# Altium PCB PCB1.PcbDoc
Units mil, origin at the board's own origin, x right, y up, seen from the top; angles counter-clockwise.
Board outline 6000 x 4000 mil, 2 copper layers (Top Layer, Bottom Layer); 11 components, 10 nets, 25 pads, 0 vias.
Unrouted connection lines stored in the file: 1.
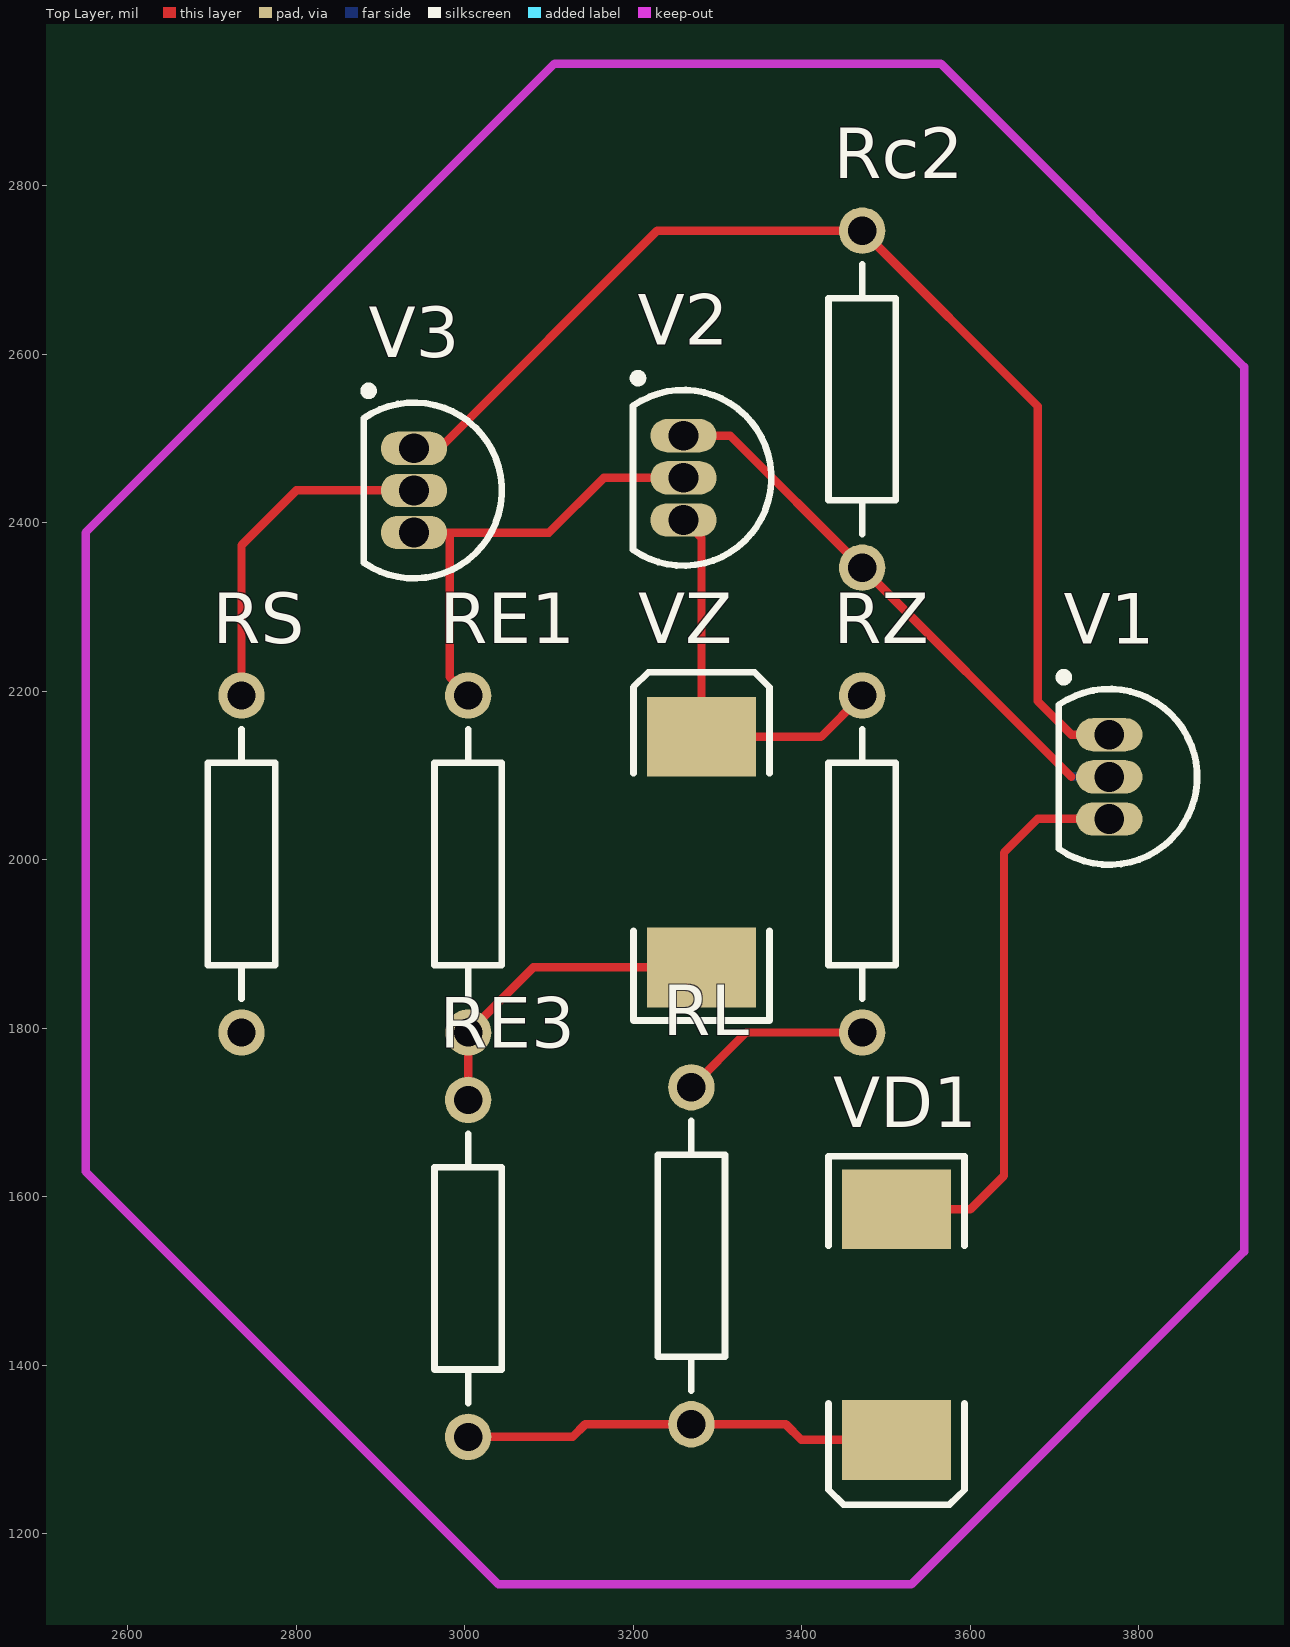
[diagram p0: Top Layer view]
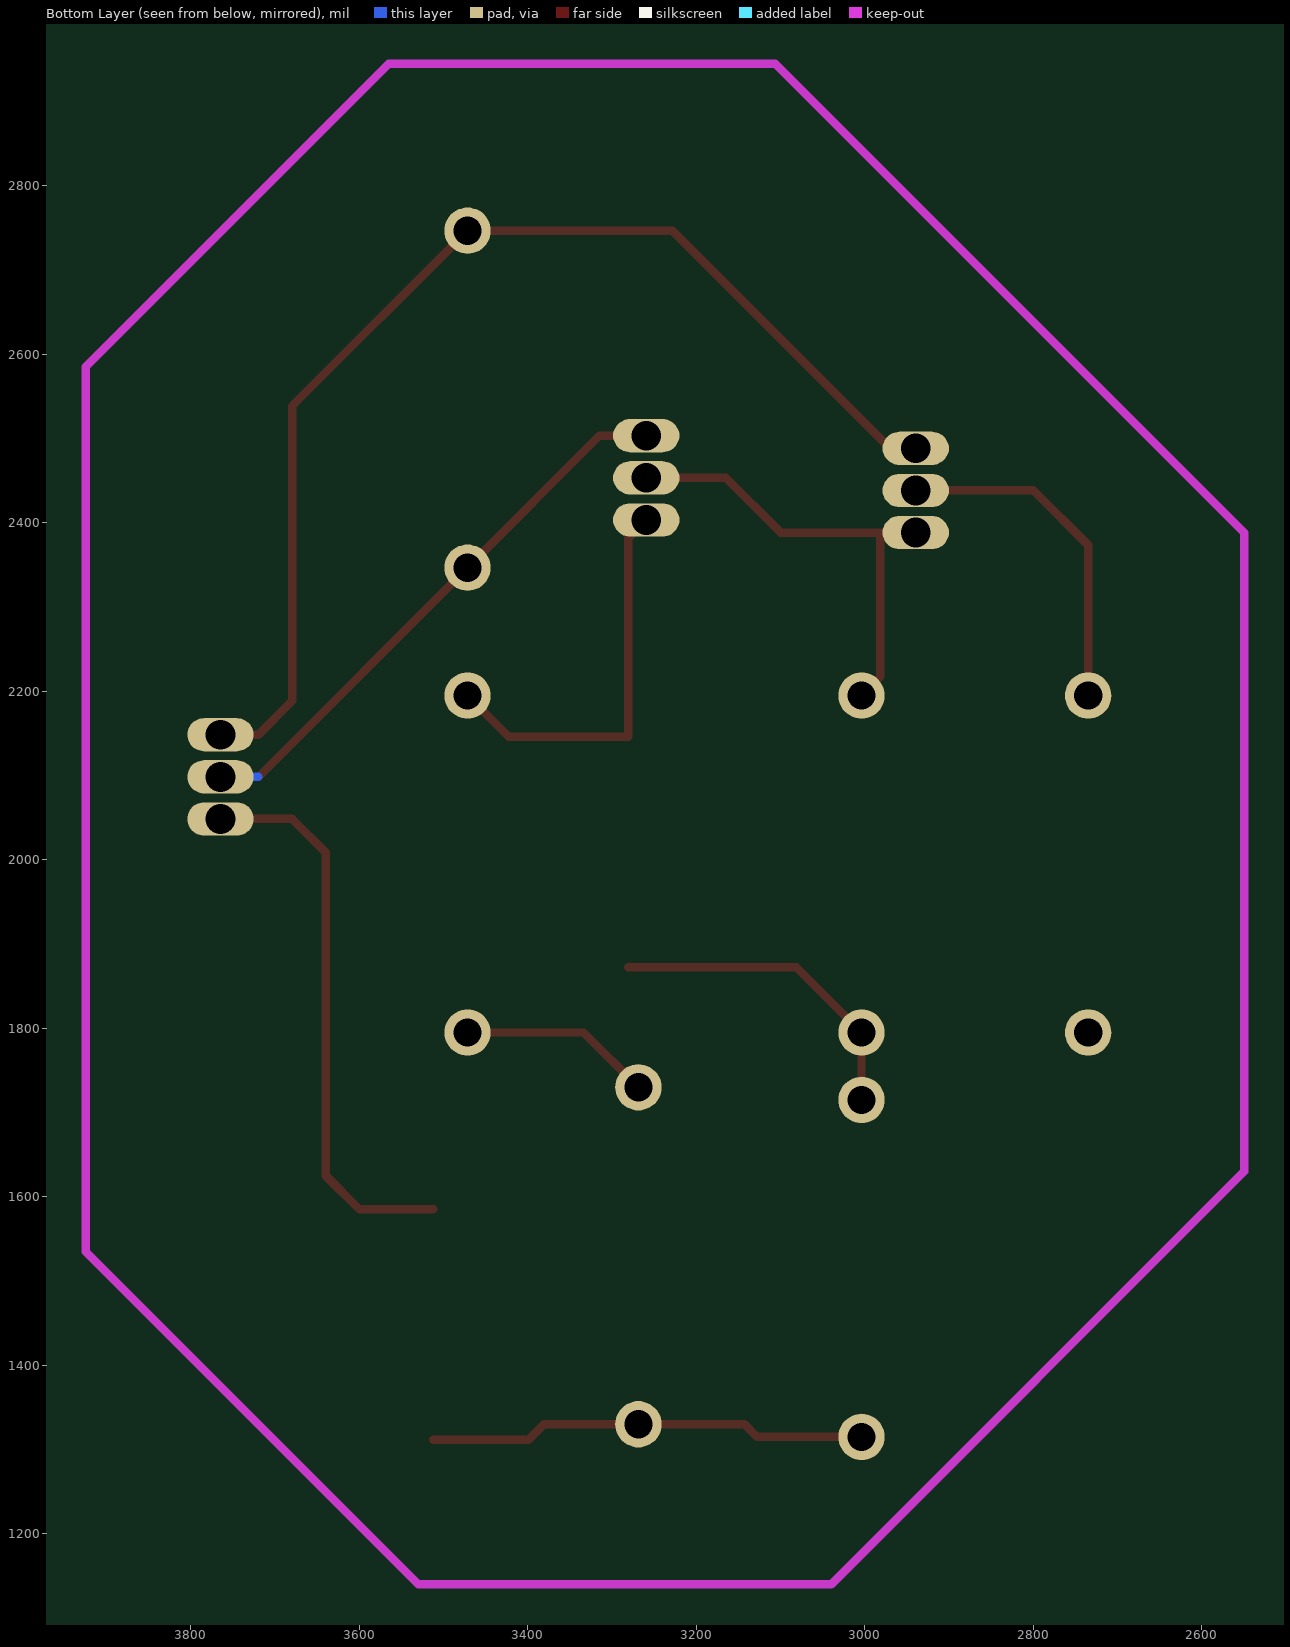
[diagram p1: Bottom Layer view, seen from below]

## Layer stack, top to bottom
Top Solder: solder mask 0.4, Solder Resist, Dk 3.5
Top Layer: signal copper 1.4
Dielectric 1: dielectric 12.6, FR-4, Dk 4.8
Bottom Layer: signal copper 1.4
Bottom Solder: solder mask 0.4, Solder Resist, Dk 3.5

## Board outline
1000,1000 7000,1000 7000,5000 1000,5000

## Design rules (kind name [scope] priority, off if disabled: settings)
Clearance [All] p1: gap=10 ignorepadtopadclearanceinfootprint=FALSE except(0: Arc-Hole Track-Hole SMDPad-Hole THPad-Hole Via-Hole Fill-Hole Poly-Hole Region-Hole Text-Hole)
PolygonConnect [All] p1: connectstyle=Relief reliefconductorwidth=10 reliefentries=4 polygonreliefangle="90 Angle" airgapwidth=10
RoutingVias [All] p1: holewidth=28 width=50 viastyle="Through Hole" minholewidth=28 minwidth=50 maxholewidth=28 maxwidth=50
SolderMaskExpansion [All] p1: expansion=4
Width [All] p1: maxlimit=10 minlimit=10 preferedwidth=10
30 further rules are at their usual default settings.

## Components (designator, comment, footprint, x,y, rotation, side; value= is the part's Value field where it differs from the comment)
Rc2 "Res2" AXIAL-0.4 3471.75,2546.71 r270 top value=3K
RE1 "Res2" AXIAL-0.4 3004.07,1995 r270 top value=5.3K
RE3 "Res2" AXIAL-0.4 3004.07,1515 r90 top value=3K
RL "Res2" AXIAL-0.4 3268.92,1530 r90 top value=0.2K
RS "Res2" AXIAL-0.4 2735,1995 r270 top value=2K
RZ "Res2" AXIAL-0.4 3471.75,1995 r270 top value=9K
V1 "NPN" TO-226-AA 3765,2098.49 r180 top
V2 "NPN" TO-226-AA 3259.59,2453.42 r180 top
V3 "NPN" TO-226-AA 2939.74,2438.42 r180 top
VD1 "Diode" SMC 3512.45,1448.19 r270 top
VZ "Diode" SMC 3280.97,2009.04 r90 top

## Footprints (in the part's own frame and the unit in brackets; to place one, negate y for a bottom-side part, rotate by r counter-clockwise, add the part's x,y. Pads: shape width x height; smd on the part's side, far side on the other; paste and mask are expansions set on the pad)
AXIAL-0.4 [mm] "Axial Device, Thru-Hole; 2 Leads; 0.4 in Pin Spacing"
  round 1.4 hole 0.85: 1(-5.08,0) 2(5.08,0)
  silkscreen extent -4.06,-1.02 4.06,1.02
SMC [mm] "DO-214-AB/SMC; 2 C-Bend Leads; Body 7.9 x 5.9 mm, inc. leads (LxW)"
  rect 2.4x3.3 smd: 1(-3.475,0) 2(3.475,0)
  silkscreen extent -5.08,-2.05 5.42,2.06
TO-226-AA [mm] "TO, Flat Index; 3 In-Line, Axial Leads; Body Dia. 4.8mm; Leads 0.55 x 0.51 mm (max)"
  oval 2x1 hole 0.9: 1(0,-1.27) 2(0,0) 3(0,1.27)
  silkscreen extent -2.65,-3.13 1.52,2.65, body extent -2.65,-2.66 1.52,2.66, height 5.33

## Part data
Rc2 RE1 RE3 RL RS RZ: "Resistor", LatestRevisionDate=17-Jul-2002, LatestRevisionNote="Re-released for DXP Platform.", PackageDescription="Axial Device, Thru-Hole; 2 Leads; 0.4 in Pin Spacing", PackageReference=AXIAL-0.4, Published=8-Jun-2000, Publisher="Altium Limited"
V1 V2 V3: "NPN Bipolar Transistor", Code_JEDEC=TO-226-AA, LatestRevisionDate=17-Jul-2002, LatestRevisionNote="Re-released for DXP Platform.", PackageDescription="TO, Flat Index; 3 In-Line, Axial Leads; Body Dia. 4.8mm; Leads 0.55 x 0.51 mm (max)", PackageReference=TO-226-AA, Published=8-Jun-2000, Publisher="Altium Limited"
VD1 VZ: "Default Diode", Code_JEDEC=DO-214-AB, LatestRevisionDate=17-Jul-2002, LatestRevisionNote="Re-released for DXP Platform.", PackageDescription="DO-214-AB/SMC; 2 C-Bend Leads; Body 7.9 x 5.9 mm, inc. leads (LxW)", PackageReference=SMC, PackageVersion=Sep-1996, Published=8-Jun-2000, Publisher="Altium Limited"

## Nets (pads, with @x,y where several pads share a name; then routed paths per layer and width w, separated by ;. In a path a pad name is that pad's centre, name@x,y a point inside that pad or via, vN(x,y) a via of type N, cw(c..) or ccw(c..) an arc to the next point about the centre after c; other vN are vias at no path point)
+6: Rc2.1 V1.1 V3.1 | length 1385
  Top Layer w10: V3.1@2970,2488.42 3228.29,2746.71 Rc2.1 3680,2538.45 3680,2188.49 3720,2148.49 V1.1
  Bottom Layer w10: V3.1 V3.1@2970,2488.42
-6: RE1.2 RE3.2 VZ.1 | length 388.9
  Top Layer w10: RE3.2 RE1.2 3081.3,1872.23 VZ.1
GND: RL.2 RZ.2 | length 229.7
  Top Layer w10: RL.2 3333.92,1795 RZ.2
NetRc2_2: Rc2.2 V1.2 V2.1 | length 673.1
  Top Layer w10: V2.1 3315.04,2503.42 Rc2.2 3719.97,2098.49
  Bottom Layer w10: 3719.97,2098.49 V1.2
NetRE1_1: RE1.1 V2.2 V3.3 | length 591.6
  Top Layer w10: RE1.1 2982,2217.07 2982,2388.42 V3.3 3100,2388.42 3165,2453.42 V2.2
NetRE3_1: RE3.1 RL.1 VD1.2 | length 522.3
  Top Layer w10: RE3.1 3128,1315 3143,1330 RL.1 3381,1330 3399.62,1311.38 VD1.2
NetRS_1: RS.1 V3.2 | length 410.1
  Top Layer w10: RS.1 2735,2373.42 2800,2438.42 V3.2
NetRZ_1: RZ.1 V2.3 VZ.2 | length 477.6
  Top Layer w10: V2.3 3280.97,2382.05 VZ.2 3422.6,2145.85 RZ.1
NetV1_3: V1.3 VD1.1 | length 669.2
  Top Layer w10: VD1.1 3600,1585 3640,1625 3640,2008.49 3680,2048.49 V1.3
VCC: RS.2

## Keep-outs
Keep-Out Layer:
  lines w10: 2550,1630 3040,1140 3530,1140 3925,1535 3925,2585 3565,2945 3106.58,2945 2550,2388.42 2550,2140 2550,1630